# EAGLE board lc-meter-lm311 (EAGLE 5.07)
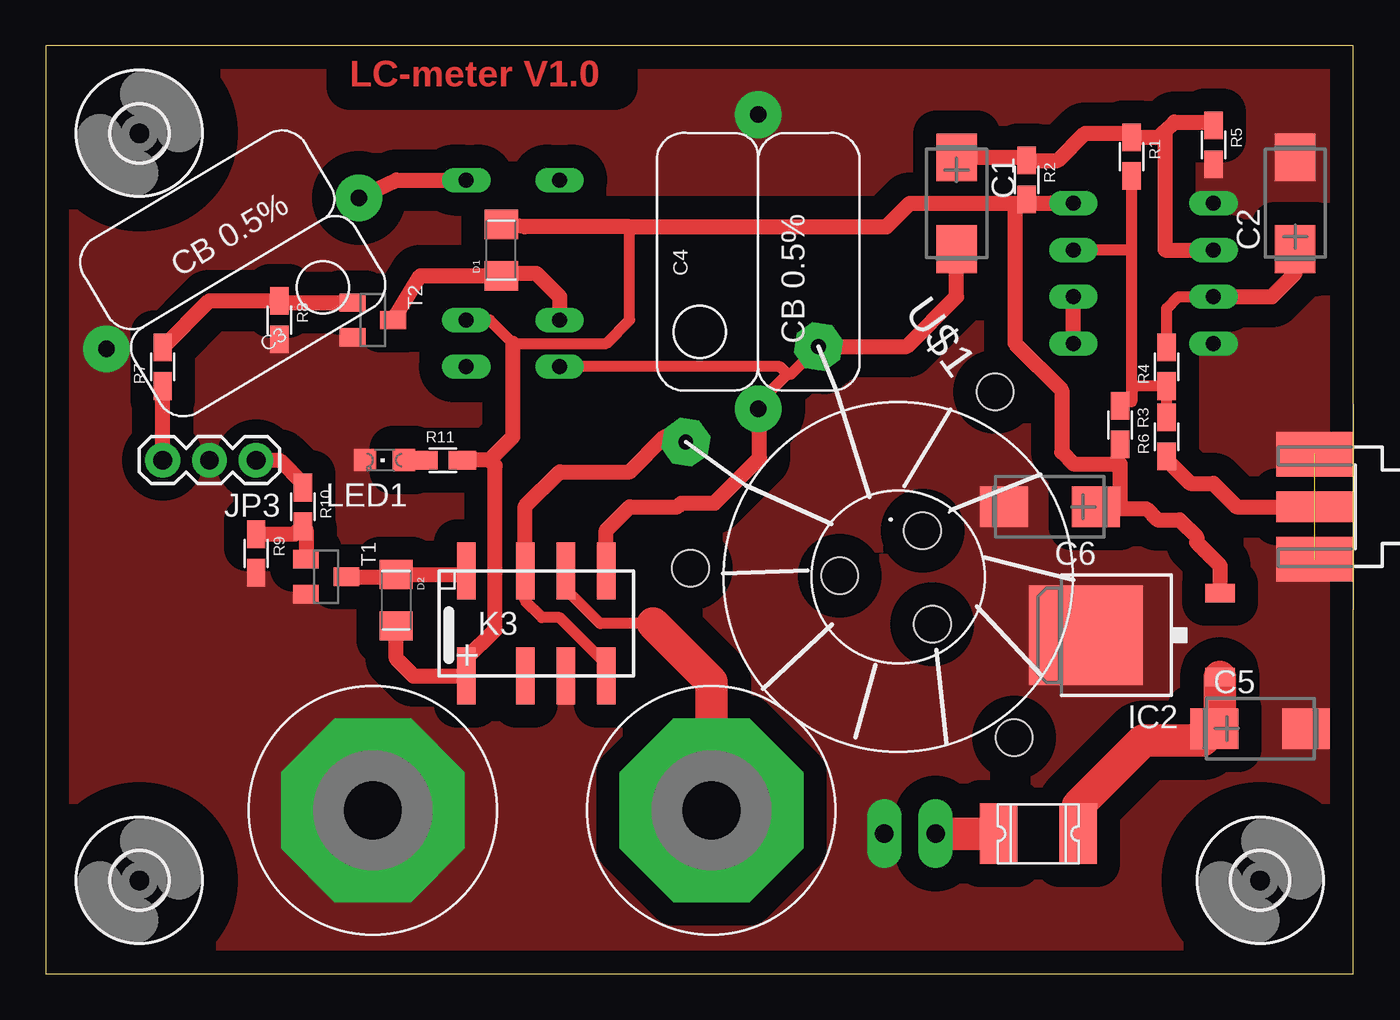
[diagram p0: board, top side]
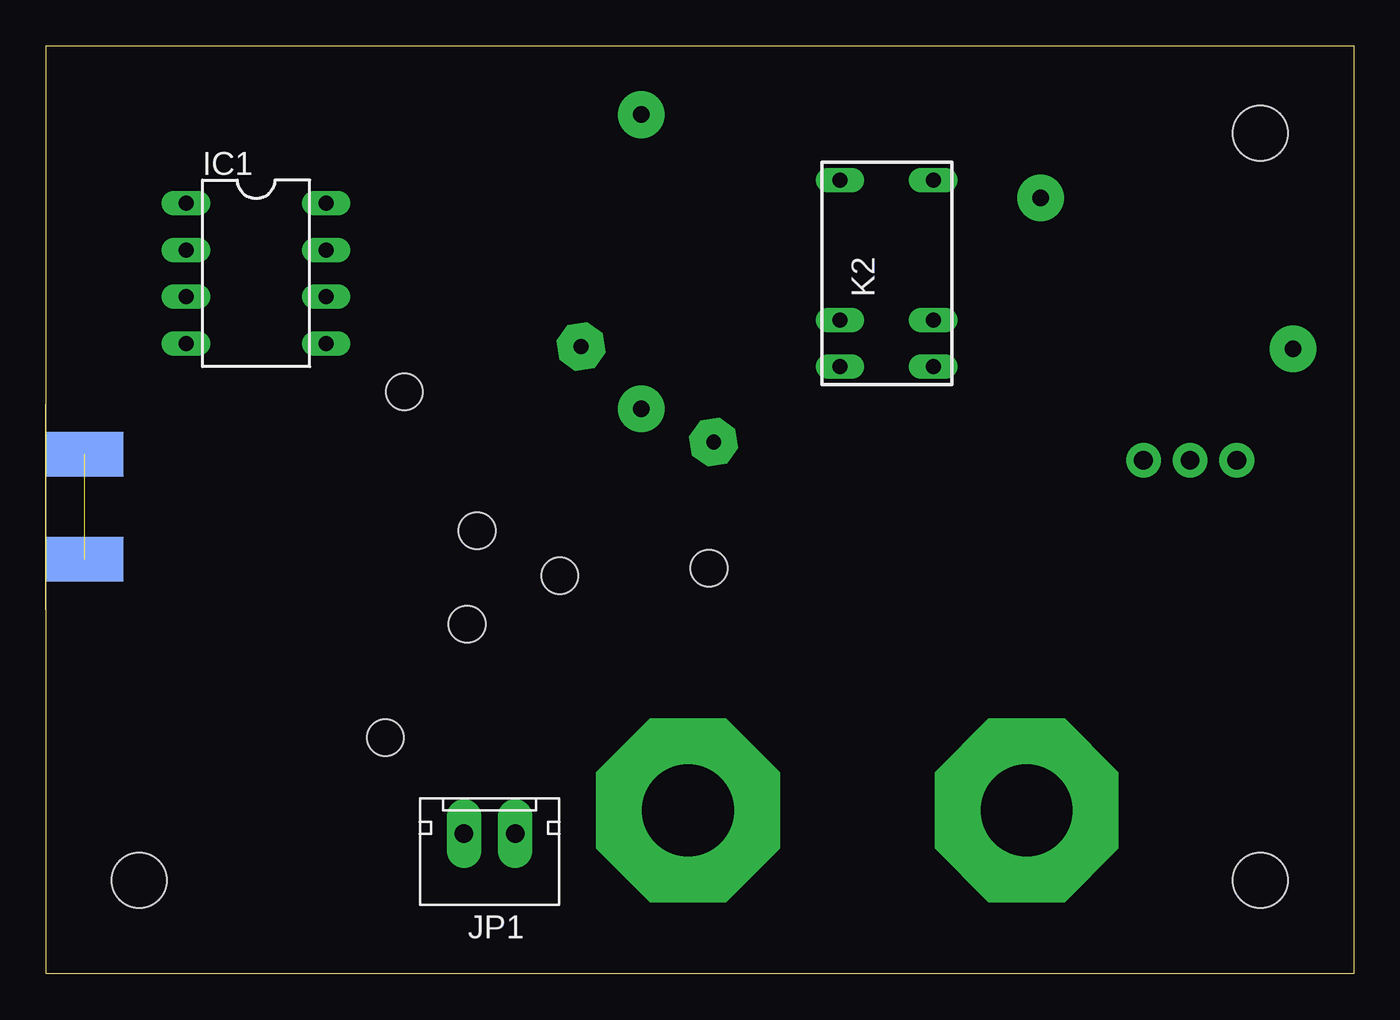
[diagram p1: board, bottom side, seen from below]

Size 71.12 x 50.47 mm. Coordinates in mm from the lower left corner, seen from the top.
Outline: 0,0 71.1,0 71.1,50.47 0,50.47 0,0
Copper layers (1*16): Top 0.035mm / dielectric 1.5mm / Bottom 0.035mm
Design rules "default": minimum track width 10mil, minimum drill 24mil, track to track 8mil, track to pad 8mil, pad to pad 8mil, via to via 8mil, smd to smd 8mil, copper to edge 40mil, drill to drill 8mil, minimum pad ring 10mil, minimum via ring 8mil, stop-mask expansion 4mil, vias tented up to drill 0mil, thermal gap 10mil

## Footprints (pad centres in the part's own frame; a part is rotated, then mirrored left to right if it is on the bottom)
CT6032 = smd 2.6 x 2.2: + -2.5,0; - 2.5,0
CB-1.3CM = drill 0.9 pad 2.54 round: 1 -8,0; 2 8,0
1206-DIODE = smd 1.6 x 1.8: A -1.4,0; K 1.4,0
1812L = smd 2.03 x 3.3: P$1 -2.16,0; P$2 2.16,0
3,0 = hole 3: 0,0
DIL-08 = drill 0.813 long: 1 -3.81,-3.81; 2 -1.27,-3.81; 3 1.27,-3.81; 4 3.81,-3.81; 5 3.81,3.81; 6 1.27,3.81; 7 -1.27,3.81; 8 -3.81,3.81
TO252 = smd 1 x 1.6: 1 -2.28,-4.8; 2 2.28,-4.8 | smd 5.4 x 6.2: 3 0,2.5
XH-1X2-LONG-LOCK-V = drill 1.016 pad 1.88 long: 1 -1.397,0; 2 1.397,0
1X03 = drill 1.016 pad 1.88 round: 1 0,0; 2 2.54,0; 3 5.08,0
G5V1 = drill 0.813 long: 1 -5.08,-2.54; 2 -2.54,-2.54; 5 5.08,-2.54; 6 5.08,2.54; 9 -2.54,2.54; 10 -5.08,2.54
UB2-NU = smd 1 x 3.1: P$1 -3.8,2.85; P$2 -0.6,2.85; P$3 1.6,2.85; P$4 3.8,2.85; P$5 3.8,-2.85; P$6 1.6,-2.85; P$7 -0.6,-2.85; P$8 -3.8,-2.85
CHIPLED_0805 = smd 1.2 x 1.2: A 0,-1.05; C 0,1.05
R0805W = smd 1.5 x 1: 1 -1.052,0; 2 1.052,0
SOT23-BEC = smd 1 x 1.4: B -0.95,-1.1; C 0,1.1; E 0.95,-1.1
T68-PIN2 = drill 0.8 pad 2.54 octagon: 3 12.7,5.08; 4 12.7,-3.81 | hole 2: 1.905,2.54; 6.985,8.89; 1.27,-2.54; 5.08,-10.16; -3.175,0; -10.795,0
SOCK-5MM = drill 5 pad 10 octagon: P$1 0,0
SMA-KE = smd 4.191 x 1.651: 1 2.115,0 | smd 4.191 x 2.413: G@1 2.115,2.86; G@2 2.115,-2.86 | smd 4.191 x 2.413 bottom: G@3 2.115,2.86; G@4 2.115,-2.86

## Placement (x,y rotation side)
C1  47uF  [CT6032]  49.53,41.91 270 top
C2  47uF  [CT6032]  67.94,41.91 90 top
C3  950pF  [CB-1.3CM]  10.16,38.1 210.9 top
C4  950pF  [CB-1.3CM]  38.73,38.73 90 top
C5  [CT6032]  66.04,13.34 0 top
C6  [CT6032]  54.61,25.4 180 top
D1  1N4148DO35-7  [1206-DIODE]  24.77,39.37 90 top
D2  1N4148DO35-7  [1206-DIODE]  19.05,20.32 270 top
F1  PTC-FUSE1812L  [1812L]  53.98,7.62 0 top
H1  MOUNT-HOLE3.0  [3,0]  5.08,5.08 0 top
H2  MOUNT-HOLE3.0  [3,0]  66.04,5.08 0 top
H4  MOUNT-HOLE3.0  [3,0]  5.08,45.72 0 top
IC1  LM311NL  [DIL-08]  59.69,38.1 270 bottom
IC2  7805DT  [TO252]  59.05,18.41 90 top
JP1  [XH-1X2-LONG-LOCK-V]  46.99,7.62 0 bottom
JP3  [1X03]  11.43,27.94 180 top
K2  RELAY-SPDTG5V1  [G5V1]  25.4,38.1 90 bottom
K3  RELAY-DPDTUB2  [UB2-NU]  26.67,19.05 0 top
LED1  [CHIPLED_0805]  18.41,27.94 90 top
R1  100k  [R0805W]  59.05,44.45 270 top
R2  100k  [R0805W]  53.34,43.18 270 top
R3  1k  [R0805W]  58.42,29.84 270 top
R4  47k  [R0805W]  60.96,33.02 90 top
R5  100k  [R0805W]  63.5,45.09 270 top
R6  47k  [R0805W]  60.96,29.21 90 top
R7  1k  [R0805W]  6.35,33.02 90 top
R8  100k  [R0805W]  12.7,35.56 270 top
R9  100k  [R0805W]  11.43,22.86 270 top
R10  1k  [R0805W]  13.97,25.4 270 top
R11  1k  [R0805W]  21.59,27.94 0 top
T1  [SOT23-BEC]  15.24,21.59 270 top
T2  [SOT23-BEC]  17.78,35.56 270 top
U$1  ML-T68  [T68-PIN2]  46.35,21.59 125.8 top
U$2  SOCK  [SOCK-5MM]  17.78,8.89 0 top
U$4  SOCK  [SOCK-5MM]  36.2,8.89 0 top
X1  SMA--KE  [SMA-KE]  71.12,25.4 180 top

## Library data of the parts
C1-C6 D1 D2 F1 IC1 JP1 JP3 K2 K3 LED1 R1-R11 T1 T2 U$2 U$4 = digital-toy
H1 H2 H4 = holes
IC2 = linear
U$1 X1 = dtoy-RF

## Nets
CAL: JP3.3 R7.1
GND: C2.- C3.2 C4.2 C5.- C6.- IC1.1 IC1.4 IC2.3 JP1.2 JP3.2 K3.P$6 LED1.C R5.2 R8.2 R9.2 T1.E T2.E U$2.P$1 X1.G@1 X1.G@2 X1.G@3 X1.G@4
N$1: K3.P$3 U$4.P$1
N$2: C1.+ IC1.2 R1.1 R2.1 R5.1
N$3: C2.+ IC1.3 R4.2
N$4: IC1.7 R1.2 R3.1 R4.1 R6.2
N$5: IC1.5 IC1.6
N$6: D2.A K3.P$1 T1.C
N$7: C3.1 K2.5
N$8: C1.- C4.1 K2.10 K3.P$4 U$1.4
N$9: R6.1 X1.1
N$10: D1.A K2.9 T2.C
N$11: R7.2 R8.1 T2.B
N$12: K3.P$2 K3.P$5 U$1.3
N$13: F1.P$1 JP1.1
N$14: C5.+ F1.P$2 IC2.1
N$15: R9.1 R10.2 T1.B
N$16: JP3.1 R10.1
N$17: LED1.A R11.1
VCC: C6.+ D1.K D2.K IC1.8 IC2.2 K2.2 K3.P$8 R2.2 R3.2 R11.2

## Tracks (layer width: path | path; a pad name or v marks a point on that pad's centre or on a via)
CAL
  Top 0.813: JP3.3 R7.1
GND  (3 unrouted)
  pour Top (isolate 1.27, no thermals): -5.08,59.69 82.55,59.69 85.72,50.8 85.72,-3.81 80.01,-10.79 0,-10.79 -10.79,-3.17 -10.79,53.98
N$1
  Top 0.61: K3.P$3 28.27,20.93 30.15,19.05 33.02,19.05
  Top 1.778: 33.02,19.05 36.2,15.88 U$4.P$1
N$2
  Top 0.61: 53.16,44.41 R2.1 | 58.84,45.72 R1.1 | 63.31,46.33 R5.1
  Top 0.813: C1.+ 53.16,44.41 | R2.1 55.03,44.23 56.52,45.72 58.84,45.72 | R1.1 60.54,45.5 60.86,45.82 | 60.86,45.82 61.37,46.33 63.31,46.33 | IC1.2 60.86,39.37 60.86,45.82
N$3
  Top 0.61: R4.2 60.96,36.2 61.59,36.83 IC1.3
  Top 0.813: IC1.3 66.67,36.83 67.94,38.1 C2.+
N$4
  Top 0.61: R6.2 R4.1 59.27,31.97 59.05,31.75 | 59.05,31.75 59.05,31.11 58.64,31.11 R3.1 | 59.05,31.75 59.05,39.37 | 59.05,39.37 R1.2 | 59.05,39.37 IC1.7
N$5
  Top 0.813: IC1.5 IC1.6
N$6
  Top 0.813: K3.P$1 22.69,21.72 D2.A 18.92,21.59 T1.C
N$7
  Top 0.813: 22.61,43.44 K2.5 19.05,43.18 C3.1
N$8
  Top 0.61: K2.10 39.93,33.02 40.34,32.61 | 40.34,32.61 40.51,32.61 U$1.4 | 40.34,32.61 38.73,31.01 C4.1 38.81,30.66
  Top 0.813: U$1.4 46.82,34.12 49.53,36.83 C1.- | 38.81,30.66 38.81,28.04 36.37,25.6 34.54,25.6 34.34,25.4 31.75,25.4 30.47,24.12 K3.P$4
N$9
  Top 0.813: X1.1 64.77,25.4 63.5,26.67 62.23,26.67 60.96,27.94 R6.1
N$10
  Top 0.61: D1.A 24.89,38.1
  Top 0.813: K2.9 27.94,36.83 26.67,38.1 24.89,38.1 | T2.C 20.36,37.97 D1.A
N$11
  Top 0.813: T2.B 12.8,36.51 R8.1 8.89,36.61 R7.2
N$12
  Top 0.61: K3.P$2 26.07,20.29 26.98,19.38 27.94,19.38 30.15,17.17 30.45,17.14 30.48,16.51 K3.P$5
  Top 0.813: K3.P$2 26.07,25.43 27.94,27.3 31.75,27.3 33.66,29.21 35.15,29.21 U$1.3
N$13
  Top 1.778: JP1.1 F1.P$1
N$14
  Top 1.778: F1.P$2 56.13,9.14 59.69,12.7 62.91,12.7 C5.+ 63.85,13.65 IC2.1
N$15
  Top 0.813: R9.1 13.54,23.91 R10.2 14.14,24.18 T1.B
N$16
  Top 0.813: JP3.1 12.7,27.94 13.97,26.67 R10.1
N$17
  Top 0.813: LED1.A R11.1
VCC
  Top 0.61: 53.12,41.91 R2.2 | K2.2 24.13,35.56 25.4,34.29 30.48,34.29 31.75,35.56 31.75,40.64 | 58.42,25.4 58.01,25.4 | 58.01,25.4 C6.+ | 58.42,27.74 R3.2 | 22.86,17.14 K3.P$8 | 52.83,41.91 52.7,41.78 | 58.01,25.4 58.12,25.3
  Top 0.813: R2.2 53.56,41.91 IC1.8 54.61,41.91 | K3.P$8 20,16.2 19.05,17.14 D2.K | D1.K 26.04,40.64 31.75,40.64 45.72,40.64 46.99,41.91 52.83,41.91 53.12,41.91 | 58.42,25.4 58.42,27.74 55.88,27.74 55.24,28.37 55.24,31.75 52.7,34.29 52.7,41.78 | 22.86,17.14 24.43,18.69 24.43,27.64 24.13,27.94 | IC2.2 63.85,22.2 62.59,23.47 62.59,23.77 61.67,24.69 60.45,24.69 59.84,25.3 58.12,25.3 | 24.13,27.94 R11.2 | 24.13,27.94 25.4,29.21 25.4,34.29

## Text on the board
Top: LC-meter V1.0